# Altium PCB Current_sensor.PcbDoc
Units mm, origin at the board's own origin, x right, y up, seen from the top; angles counter-clockwise.
Board outline 95 x 29 mm, 2 copper layers (Top Layer, Bottom Layer); 24 components, 14 nets, 74 pads, 8 vias.
Unrouted connection lines stored in the file: 1.
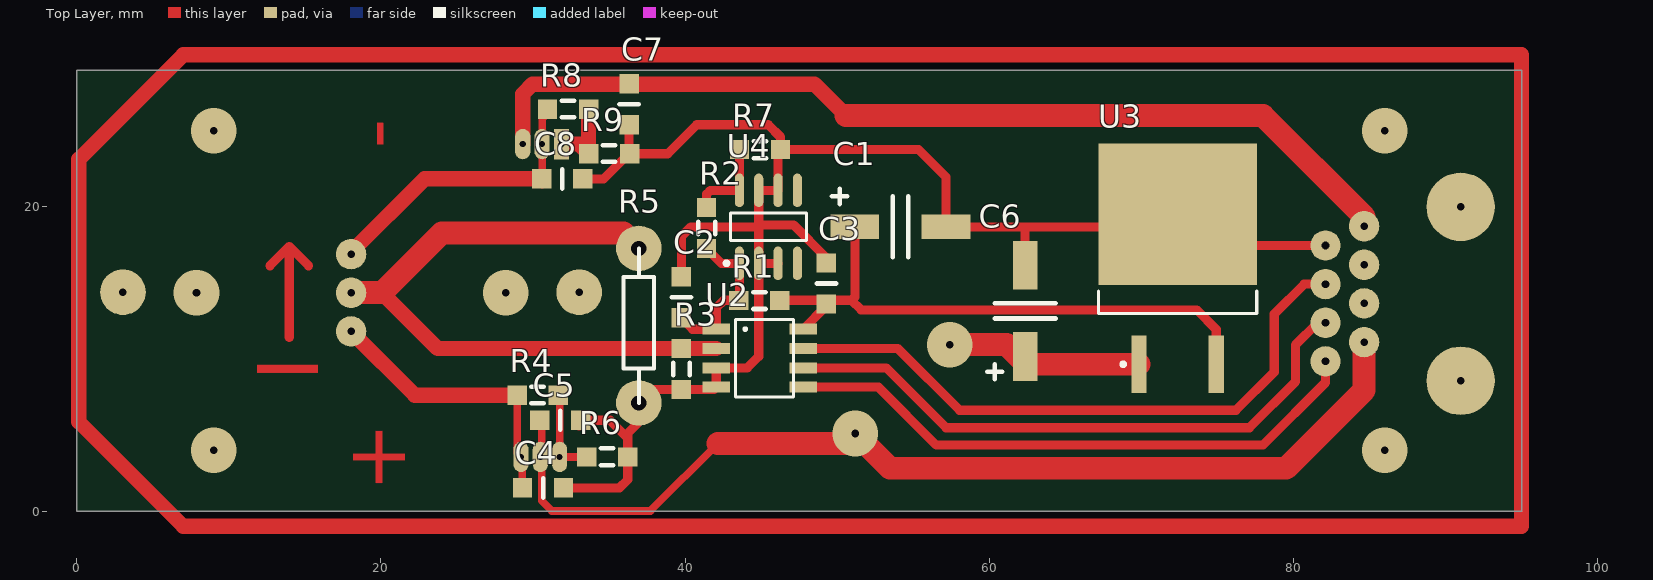
[diagram p0: Top Layer view]
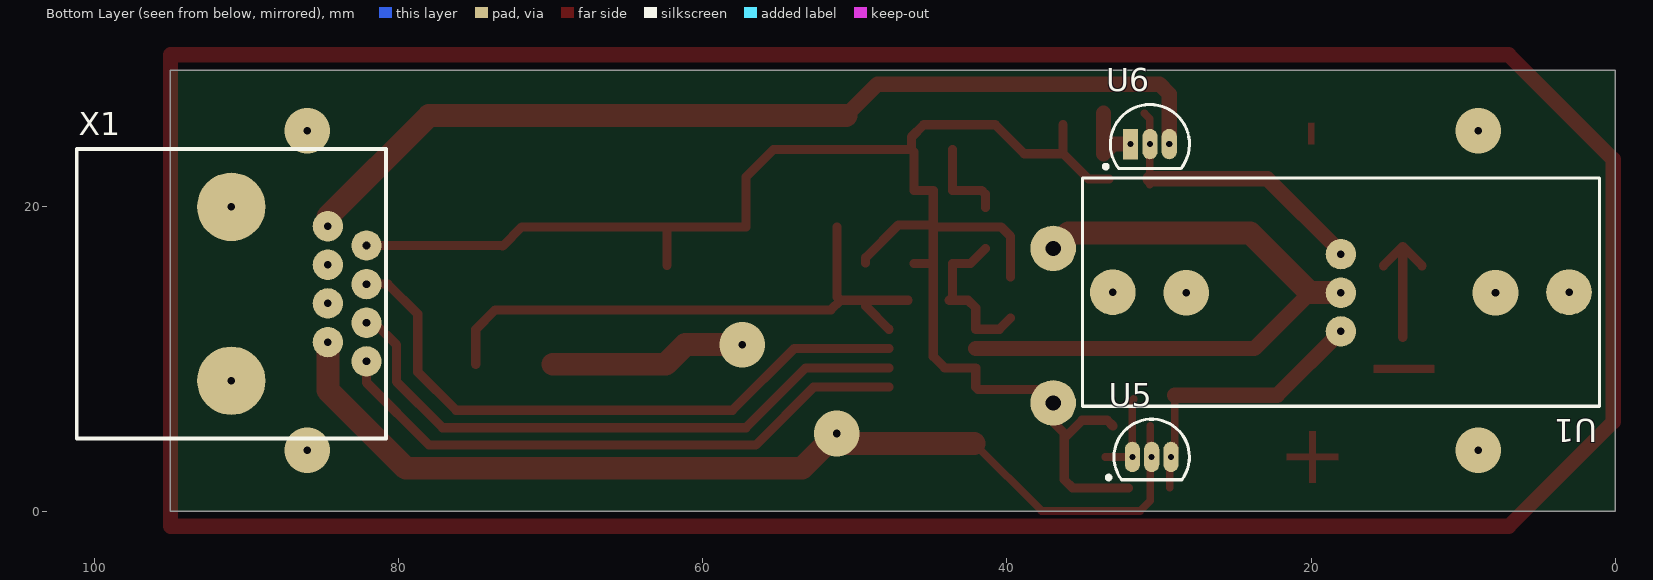
[diagram p1: Bottom Layer view, seen from below]
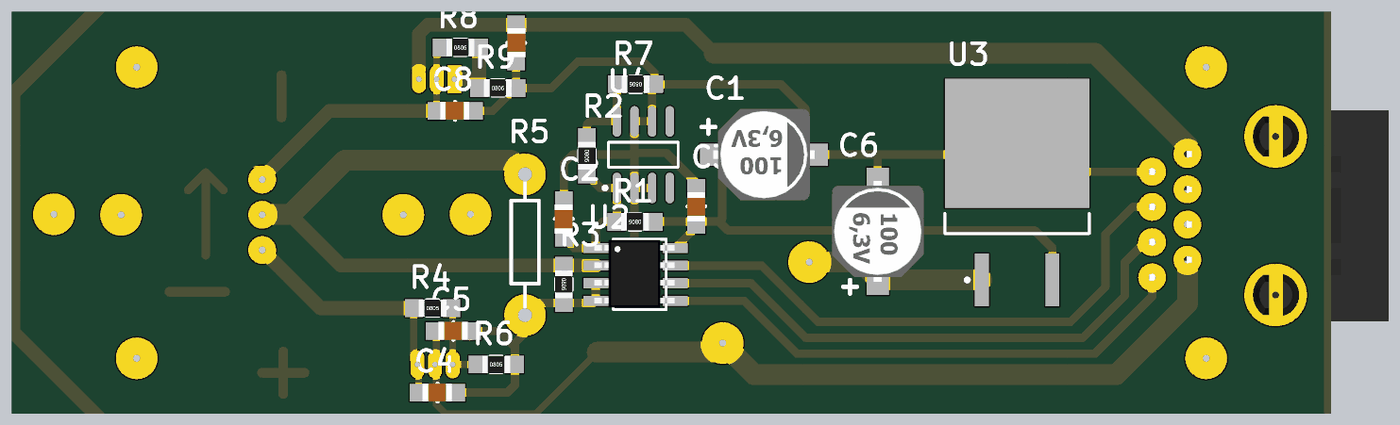
[diagram p2: 3D render of the assembled board from above, using the file's embedded part models]

## Layer stack, top to bottom
Top Solder: solder mask 0.0102, Solder Resist, Dk 3.5
Top Layer: signal copper 0.0356
Dielectric 1: dielectric 0.32, FR-4, Dk 4.8
Bottom Layer: signal copper 0.0356
Bottom Solder: solder mask 0.0102, Solder Resist, Dk 3.5

## Board outline
0,0 0,29 95,29 95,0

## Design rules (kind name [scope] priority, off if disabled: settings)
Clearance [All] p1: gap=0.254
PolygonConnect [All] p1: connectstyle=Relief reliefconductorwidth=0.254 reliefentries=4 polygonreliefangle="90 Angle" airgapwidth=0.254
RoutingVias [All] p1: holewidth=0.711 width=1.27 viastyle="Through Hole" minholewidth=0.711 minwidth=1.27 maxholewidth=0.711 maxwidth=1.27
SolderMaskExpansion [All] p1: expansion=0.102
Width [All] p1: maxlimit=5 minlimit=0.254 preferedwidth=0.5
30 further rules are at their usual default settings.

## Components (designator, comment, footprint, x,y, rotation, side; value= is the part's Value field where it differs from the comment)
C1 "Cond_polar" CAP_EL_SMD_6.3mm 51.16,18.688 r0 top
C2 "100nF" C0805 39.751,15.4 r270 top
C3 "100nF" C0805 49.286,16.308 r270 top
C4 "100nF" C0805 32.004,1.524 r180 top
C5 "100nF" C0805 33.147,5.969 r180 top
C6 "Cond_polar" CAP_EL_SMD_6.3mm 62.357,10.16 r90 top
C7 "100nF" C0805 36.322,25.4 r90 top
C8 "100nF" C0805 33.274,21.844 r180 top
R1 "1K" R0805 46.228,13.843 r180 top
R2 "10K" R0805 41.412,19.958 r270 top
R3 "250" R0805 39.751,10.687 r270 top
R4 "33K" R0805 28.956,7.62 r0 top
R5 "Resirtor_vivodnoi" res_vivod 36.957,7.112 r90 top
R6 "4.7K" R0805 33.528,3.556 r0 top
R7 "15K" R0805 46.271,23.768 r180 top
R8 "120" R0805 30.955,26.416 r0 top
R9 "910" R0805 33.655,23.495 r0 top
U1 "CSLA1CH_current_sensor" CSLA1CH_current_sensor 18.034,16.891 r270 bottom
U2 "MCP3201-BI/SN" SO8 42.047,11.957 r270 top
U3 "L7805ABD2T-TR" TO-263_N 72.39,15.952 r90 top
U4 "TL431ACD" SO8_N 45.476,18.688 r90 top
U5 "LM317LZ-TR" TO-92 30.48,3.556 r270 bottom
U6 "LM337LZ/NOPB" Z03A 30.596,24.13 r270 bottom
X1 "RJ45" RJ45 84.65,18.73 r270 bottom

## Footprints (in the part's own frame and the unit in brackets; to place one, negate y for a bottom-side part, rotate by r counter-clockwise, add the part's x,y. Pads: shape width x height; smd on the part's side, far side on the other; paste and mask are expansions set on the pad)
C0805 [mm]
  rect 1.27x1.27 smd: 1(0,0) 2(2.7,0)
  silkscreen extent 1.35,-0.63 1.35,0.64, body extent 0.32,-0.66 2.42,0.64, height 0.51
CAP_EL_SMD_6.3mm [mm]
  rect 3.2x1.6 smd: 1(0,0) 2(6,0)
  silkscreen extent -1.5,-2 3.5,2.5, body extent -0.65,-3.3 6.65,3.3, height 5.9
CSLA1CH_current_sensor [mm]
  round 2 hole 0.5: 1(0,0) 2(2.54,0) 3(5.08,0)
  round 3 hole 0.5: 5(2.5,15) 6(2.5,-15)
  silkscreen extent -5,-17 10,17
R0805 [mm]
  rect 1.27x1.27 smd: 1(0,0) 2(2.7,0)
  silkscreen extent 0.94,-0.53 1.75,0.56, body extent 0.35,-0.62 2.35,0.63, height 0.61
res_vivod [mil]
  round 118 hole 39.37: 1(0,0) 2(400,0)
  silkscreen extent 0,-39 400,39
RJ45 [mm]
  round 2 hole 0.5: 1(0,0) 2(1.27,2.54) 3(2.54,0) 4(3.81,2.54) 5(5.08,0) 6(6.35,2.54) 7(7.62,0) 8(8.89,2.54)
  round 4.5 hole 0.5: 9(-1.27,-6.35) 10(10.16,-6.35)
  silkscreen extent -5.08,-16.51 13.97,3.81, body extent -3.18,-14.48 12.06,3.81, height 12.7
SO8 [mm]
  rect 0.72x1.8 smd: 1(0,0) 2(1.27,0) 3(2.54,0) 4(3.81,0) 5(3.81,5.715) 6(2.54,5.715) 7(1.27,5.715) 8(0,5.715)
  silkscreen extent -0.64,1.27 4.44,5.08, body extent -0.58,-0.1 4.32,5.68, height 1.45
SO8_N [mm] "SOIC, 8-Leads, Body 4.9x3.9mm, Pitch 1.27mm, IPC Medium Density"
  oval 2.2x0.6 smd: 1(-2.4,1.905) 2(-2.4,0.635) 3(-2.4,-0.635) 4(-2.4,-1.905) 5(2.4,-1.905) 6(2.4,-0.635) 7(2.4,0.635) 8(2.4,1.905)
  silkscreen extent -2.52,-2.5 0.9,2.88, body extent -1.95,-2.45 1.95,2.45, height 1.75
TO-92 [mm] "TO, Flat Index; 3 In-Line, Axial Leads; Body Dia. 4.7mm; Lead Dia. 0.56 mm (max)"
  oval 2x1 hole 0.4: 1(0,-1.27) 2(0,0) 3(0,1.27)
  silkscreen extent -2.48,-2.96 1.5,2.48, body extent -2.48,-2.5 1.5,2.5, height 4.95
TO-263_N [mm] "D2-PAK, 4-Leads, Body 9.2x10.2mm, Pitch 2.54mm, Lead Span 15.4mm, IPC Medium Density"
  rect 3.8x1 smd: 1(-6.3,2.54) 3(-6.3,-2.54)
  rect 9.3x10.4 smd: 4(3.55,0)
  silkscreen extent -6.42,-5.2 -1.5,5.2, body extent -2.95,-5.2 6.4,5.2, height 4.6
Z03A [mm] "TO, Flat Index; 3 In-Line, Axial Leads; Body Dia. 5mm; Leads 0.55 x 0.50 mm (max)"
  rect 2x1 hole 0.4: 1(0,-1.27)
  oval 2x1 hole 0.4: 2(0,0) 3(0,1.27)
  silkscreen extent -2.6,-3.02 1.6,2.6, body extent -2.6,-2.61 1.6,2.61, height 5.2

## Part data
C2 C3 C4 C5 C7 C8: library part Condensator
R1 R2 R3 R4 R6 R7 R8 R9: library part Resistor
U3: "Positive Voltage Regulator, 3-Pin D2PAK, Tape and Reel"
U4: "Programmable Voltage Reference"
U5: "Low Current 1.2 to 37V Adjustable Voltage Regulator, 3-Pin TO-92, Tape and Reel"
U6: "3-Terminal Adjustable Regulator, 3-pin TO-92, Pb-Free"

## Via types
v1: diameter 3, hole 0.5, Top Layer to Bottom Layer, 8 vias

## Nets (pads, with @x,y where several pads share a name; then routed paths per layer and width w, separated by ;. In a path a pad name is that pad's centre, name@x,y a point inside that pad or via, vN(x,y) a via of type N, cw(c..) or ccw(c..) an arc to the next point about the centre after c; other vN are vias at no path point)
+5V: C1.1 C3.2 R1.1 U2.8 U3.3 | length 38.7
  Top Layer w0.6: R1.1@46.492,13.862 50.937,13.862 ; U2.8 49.286,13.481 C3.2 ; C1.1 51.16,14.085 50.937,13.862 ; U3.3 74.93,11.938 73.641,13.227 51.572,13.227 50.937,13.862
+10V: C4.2 R4.1 U1.3 U5.3 | length 18.9
  Top Layer w0.5: R4.1 28.956,3.81 U5.3 29.304,3.462 C4.2
  Top Layer w1: U1.3 22.225,7.62 R4.1
+12V: C5.2 C6.1 U3.1 U5.2 X1.7 | length 80.6
  Top Layer w0.5: C5.2@30.574,5.588 30.574,0.668 31.238,0.004 37.723,0.004 42.164,4.445
  Top Layer w1.5: 42.164,4.445 50.537,4.445 v1(51.191,5.099) 53.477,2.813 79.521,2.813 84.65,7.942 X1.7 ; v1(57.414,10.941) 61.147,10.941 62.436,9.652 U3.1
-10V: C8.2 R8.1 U1.1 U6.2 | length 22.7
  Top Layer w0.5: U1.1 20.32,19.177 ; C8.2@30.596,21.474 U6.2 30.596,25.803 R8.1@30.955,26.162
  Top Layer w1: U1.1 18.034,17.018 22.86,21.844 C8.2
-12V: C7.2 U6.3 X1.1 | length 63.1
  Top Layer w1: U6.3 29.326,27.421 29.972,28.067 48.514,28.067 50.581,26
  Top Layer w1.5: 50.581,26 78,26 84.65,19.35 X1.1
CLK: U2.7 X1.4 | length 41.7
  Top Layer w0.6: U2.7 53.985,10.687 58.049,6.623 76.219,6.623 78.74,9.144 78.74,12.954 80.706,14.92 X1.4
CS: U2.5 X1.8 | length 39
  Top Layer w0.6: U2.5 52.715,8.147 56.525,4.337 77.997,4.337 82.11,8.45 X1.8
GND: C1.2 C2.1 C3.1 C4.1 C5.1 C6.2 C7.1 C8.1 R3.2 R5.1 R6.2 R7.1 R9.2 U2.3 U2.4 U3.4 U4.2 U4.3 U4.6 U4.7 X1.2 | length 113.7
  Top Layer w0.6: C4.1 35.687,1.524 36.228,2.065 R6.2 36.228,4.793 ; C5.1@33.02,5.588 33.401,5.969 35.052,5.969 36.228,4.793 ; C8.1 34.638,21.844 36.322,23.528 C7.1 ; R9.2 38.862,23.495 40.767,25.4 45.466,25.4 46.271,24.595 R7.1 55.353,23.768 57.16,21.961 C1.2 62.357,18.688 ; C2.1 39.751,18.053 40.386,18.688 44.714,18.688 44.841,18.815 ; U4.3 U4.2 ; R7.1@46.111,23.608 U4.6 U4.7 44.841,18.815 ; C3.1 49.286,16.656 47.127,18.815 44.841,18.815 ; C6.2 62.357,18.688 ; X1.2 73.204,17.46 73.162,17.418 71.892,18.688 62.357,18.688 ; 36.228,4.793 36.228,5.113 36.957,5.842 R5.1 37.846,8.001 41.901,8.001 U2.4 U2.3 44.088,9.417 44.841,10.17 U4.2 ; U4.2 44.841,18.815
MISO: U2.6 X1.6 | length 40.3
  Top Layer w0.6: U2.6 53.223,9.417 57.16,5.48 77.108,5.48 80.137,8.509 80.137,10.922 81.595,12.38 X1.6
NetR2_1: R2.1 R7.2 U4.8 | length 5.8
  Top Layer w0.6: R2.1 41.412,20.838 41.662,21.088 U4.8 R7.2
NetR3_1: R3.1 R5.2 U1.2 U2.2 | length 44.1
  Top Layer w1: 20.047,14.37 23.73,10.687 R3.1 U2.2
  Top Layer w1.5: U1.2@18.425,14.37 20.047,14.37 20.085,14.37 24.003,18.288 35.941,18.288 R5.2
NetR4_2: R4.2 R6.1 U5.1 | length 5.6
  Top Layer w0.5: R4.2@31.656,7.366 31.75,7.272 U5.1 R6.1
NetR8_2: R8.2 R9.1 U6.1 | length 4.7
  Top Layer w1: U6.1 33.02,24.13 R9.1 R8.2@33.655,26.162
VREF: C2.2 R1.2 R2.2 U2.1 U4.1 | length 11
  Top Layer w0.6: C2.2 40.494,11.957 U2.1 42.047,13.354 42.555,13.862 43.792,13.862 43.571,14.083 U4.1 42.382,16.288 R2.2
pads on no net: U1.5 U1.6 U4.4 U4.5 X1.3 X1.5 X1.9 X1.10
copper on no net: | length 253.3
  Top Layer w0.6: 12.7,16.129 13.97,17.399 ; 13.97,11.43 13.97,17.399 ; 15.24,16.129 13.97,17.399
  Top Layer w1: 0.127,5.873 0.127,23.127 7,30 95,30 95,-1 7,-1 0.127,5.873
  other v1: 9,4 86,4 7.874,14.351 28.194,14.351 9,25 86,25

## Other copper
Top Layer:
  text "-" at 21.463,25.781 h4 r90
  text "I" at 15.875,10.16 h4 r90
  text "+" at 21.59,5.842 h4 r90